# EAGLE board PCB (EAGLE 9.7.0)
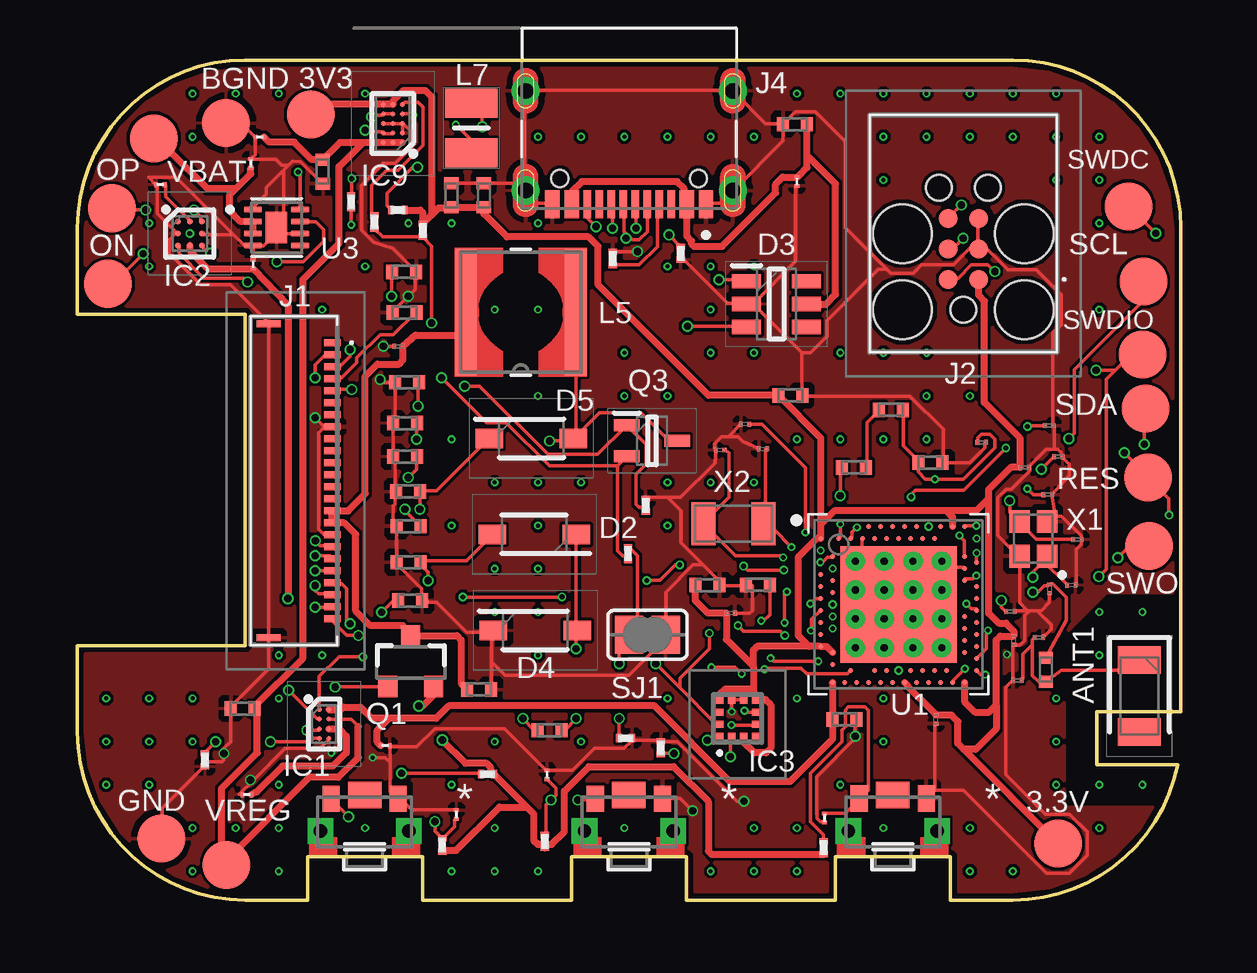
[diagram p0: board, top side]
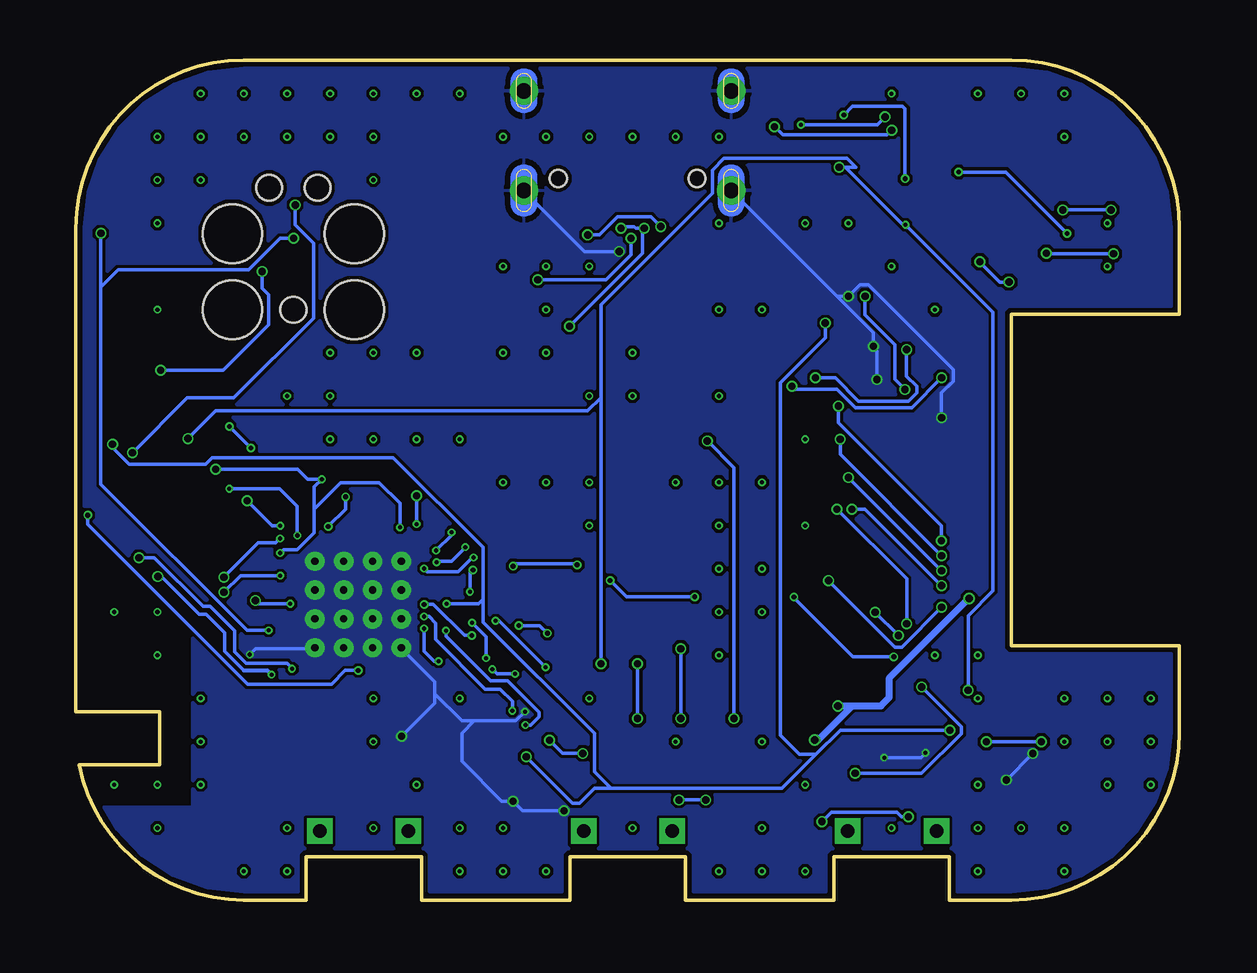
[diagram p1: board, bottom side, seen from below]

Size 46 x 35 mm. Coordinates in mm from the lower left corner, seen from the top.
Outline: 39,0 36.4,0 36.4,1.8 31.6,1.8 31.6,0 25.4,0 25.4,1.8 20.6,1.8 20.6,0 14.4,0 14.4,1.8 9.6,1.8 9.6,0 7,0 arc-90 0,7 0,10.6 7,10.6 7,24.4 0,24.4 0,28 arc-90 7,35 39,35 arc-90 46,28 46,7.85 42.5,7.85 42.5,5.63 45.86,5.63 arc-79 39,0
Copper layers (1*16): Top / Bottom
Stack-up Default Layer Stack: Top User Defined 0.035mm / Dielectric-1 User Defined 0.9mm / Bottom User Defined 0.035mm
Design rules: minimum copper width classes=1 0.3mm, minimum copper width classes=0 0.15mm, minimum copper width 5mil, minimum drill size 0.15mm, copper clearance wire_polygon to wire_polygon 5mil, copper clearance wire_polygon to pad_smd 5mil, copper clearance wire_polygon to via 5mil, copper clearance pad_smd to pad_smd 5mil, copper clearance pad_smd to via 5mil, copper clearance via to via 5mil, copper clearance smd to pad (same net) 5mil, copper clearance smd to via (same net) 5mil, copper clearance smd to smd (same net) 5mil, dimension clearance 0.2mm, via restrict clearance 0mil, restrict clearance 0mil, drill distance 6mil, keepout clearance 0mil
Net classes: 0 default: width 0.15 mm; 1 power: width 0.3 mm

## Footprints (pad centres in the part's own frame; a part is rotated, then mirrored left to right if it is on the bottom)
2450AT18B100E_ANTC3216X140N = smd 1.15 x 1.8: 1 -1.5,0; 2 1.5,0
NORDIC_NRF_3_RESC0201_L = smd 0.15 x 0.2: 1 -0.177,-0.004; 2 0.179,0
NORDIC_NRF_3_RESC0402_L = smd 0.5 x 0.6: 1 -0.5,0; 2 0.5,0
GRM011R60J152KE01L_1_0201 = smd 0.2 x 0.15: 1 0,0.185; 2 0,-0.185
ESP32_C6_LIBRARY_5_SOD3716X135N = smd 1.15 x 0.8: 1 -1.75,0; 2 1.75,0
ESP32_C6_LIBRARY_3_SOT95P280X145-6N = smd 1.2 x 0.6: 1 -1.25,0.95; 2 -1.25,0; 3 -1.25,-0.95; 4 1.25,-0.95; 5 1.25,0; 6 1.25,0.95
BQ25180YBGR_BGA8C40P2X4_100X155X50 = smd 0.2 x 0.2: A1 -0.2,0.6; A2 0.2,0.6; B1 -0.2,0.2; B2 0.2,0.2; C1 -0.2,-0.2; C2 0.2,-0.2; D1 -0.2,-0.6; D2 0.2,-0.6
DRV2605YZFR_BGA9C50P3X3_144X144X62 = smd 0.25 x 0.25: A1 -0.5,0.5; A2 0,0.5; A3 0.5,0.5; B1 -0.5,0; B2 0,0; B3 0.5,0; C1 -0.5,-0.5; C2 0,-0.5; C3 0.5,-0.5
BMA423_BMA423 = smd 0.3 x 0.35: 1 -0.75,-0.775; 2 -0.25,-0.775; 3 0.25,-0.775; 4 0.75,-0.775; 7 0.75,0.775; 8 0.25,0.775; 9 -0.25,0.775; 10 -0.75,0.775 | smd 0.35 x 0.3: 5 0.775,-0.25; 6 0.775,0.25; 11 -0.775,0.25; 12 -0.775,-0.25
RT6160AWSC_BGA15C40P3X5_140X230X60 = smd 0.216 x 0.216: A1 -0.4,0.8; A2 0,0.8; A3 0.4,0.8; B1 -0.4,0.4; B2 0,0.4; B3 0.4,0.4; C1 -0.4,0; C2 0,0; C3 0.4,0; D1 -0.4,-0.4; D2 0,-0.4; D3 0.4,-0.4; E1 -0.4,-0.8; E2 0,-0.8; E3 0.4,-0.8
503480-2400_5034802400 = smd 0.3 x 0.7: 1 -5.75,1.525; 2 -5.25,1.525; 3 -4.75,1.525; 4 -4.25,1.525; 5 -3.75,1.525; 6 -3.25,1.525; 7 -2.75,1.525; 8 -2.25,1.525; 9 -1.75,1.525; 10 -1.25,1.525; 11 -0.75,1.525; 12 -0.25,1.525; 13 0.25,1.525; 14 0.75,1.525; 15 1.25,1.525; 16 1.75,1.525; 17 2.25,1.525; 18 2.75,1.525; 19 3.25,1.525; 20 3.75,1.525; 21 4.25,1.525; 22 4.75,1.525; 23 5.25,1.525; 24 5.75,1.525 | smd 0.3 x 1: MP1 -6.54,-1.125; MP2 6.54,-1.125
TC2030-IDC_TC2030IDC = smd 0.783 x 0.783: 1 -0.953,-0.635; 2 -0.953,0.635; 3 0.317,-0.635; 4 0.317,0.635; 5 1.588,-0.635; 6 1.588,0.635 | hole 2.451: -2.223,-2.54; -2.223,2.54; 0.952,-2.54; 0.952,2.54 | hole 1.067: -2.223,0; 2.857,-1.016; 2.857,1.016
KH-TYPE-C-16P_KINGHELM_KH-TYPE-C-16P = smd 0.6 x 1.15: A1_B12 -3.2,4.725; A4_B9 -2.4,4.725; A9_B4 2.4,4.725; A12_B1 3.2,4.725 | smd 0.3 x 1.15: A5 -1.25,4.725; A6 -0.25,4.725; A7 0.25,4.725; A8 1.25,4.725; B5 1.75,4.725; B6 0.75,4.725; B7 -0.75,4.725; B8 -1.75,4.725 | drill 0.65 pad 1.05: SH1 -4.32,0; SH2 4.32,0; SH3 -4.32,4.15; SH4 4.32,4.15 | hole 0.7: -2.89,3.65; 2.89,3.65
NORDIC_NRF_2_RESC0402_L = smd 0.5 x 0.6: 1 -0.5,0; 2 0.5,0
ESP32_C6_LIBRARY_2_IND_4828-WE-TPC_WRE = smd 0.9 x 5.3: 1 -2.286,0; 2 2.286,0
MLP2016SR47MT0S1_INDC2016X100N = smd 1.2 x 2.2: 1 -1.028,0; 2 1.028,0
ESP32_C6_LIBRARY_4_ESP32_C6_LIBRARY_4_ESP32_C6_LIBRARY_4_ESP32_C6_LIBRARY_4_ESP32_WROVER_SPARKFUN-DISCRETESEMI_SOT23-3 = smd 0.8 x 0.9: 1 -0.95,-1; 2 0.95,-1; 3 0,1.1
ESP32_C6_LIBRARY_6_SOT65P210X110-3N = smd 1.05 x 0.5: 1 -1.05,0.65; 2 -1.05,-0.65; 3 1.05,0
ERA-1AEB3401C_0201 = smd 0.35 x 0.25: 1 0,0.275; 2 0,-0.275
ESP32_C6_LIBRARY_7_JUMPER_SJ = smd 1.168 x 1.6: 1 -0.762,0; 2 0.762,0
2025-10-22_07-23-44_LIBRARY_SW_EVP-AKE31A_PAN = smd 0.711 x 1.092: 1 -1.4,-0.972; 2 1.4,-0.972 | drill 0.559 pad 0.914 square: 3 -1.848,0.381; 4 1.848,0.381 | smd 1.397 x 1.092: 5 0,-1.124
HECTOR_WATCH_1_TP20R = smd 2 x 2: TP 0,0
NORDIC_NRF_4_AQFN50P700X700X85_HS-74N = smd 4.85 x 4.85: P$74 0,0 | drill 0.3 pad 0.6: P$75 -1.8,1.8; P$76 -0.6,1.8; P$77 0.6,1.8; P$78 1.8,1.8; P$79 -1.8,0.6; P$80 -0.6,0.6; P$81 0.6,0.6; P$82 1.8,0.6; P$83 -1.8,-0.6; P$84 -0.6,-0.6; P$85 0.6,-0.6; P$86 1.8,-0.6; P$87 -1.8,-1.8; P$88 -0.6,-1.8; P$89 0.6,-1.8; P$90 1.8,-1.8 | smd 0.2 x 0.2: P$A8 -1.25,3.25; P$A10 -0.75,3.25; P$A12 -0.25,3.25; P$A14 0.25,3.25; P$A16 0.75,3.25; P$A18 1.25,3.25; P$A20 1.75,3.25; P$A22 2.25,3.25; P$A23 2.75,3.25; P$AA24 3.25,-2.25; P$AB2 -2.75,-2.5; P$AC5 -2,-2.75; P$AC9 -1,-2.75; P$AC11 -0.5,-2.75; P$AC13 0,-2.75; P$AC15 0.5,-2.75; P$AC17 1,-2.75; P$AC19 1.5,-2.75; P$AC21 2,-2.75; P$AC24 3.25,-2.75; P$AD2 -2.75,-3.25; P$AD4 -2.25,-3.25; P$AD6 -1.75,-3.25; P$AD8 -1.25,-3.25; P$AD10 -0.75,-3.25; P$AD12 -0.25,-3.25; P$AD14 0.25,-3.25; P$AD16 0.75,-3.25; P$AD18 1.25,-3.25; P$AD20 1.75,-3.25; P$AD22 2.25,-3.25; P$AD23 2.75,-3.25; P$B1 -3.25,2.75; P$B3 -2.5,2.75; P$B5 -2,2.75; P$B7 -1.5,2.75; P$B9 -1,2.75; P$B11 -0.5,2.75; P$B13 0,2.75; P$B15 0.5,2.75; P$B17 1,2.75; P$B19 1.5,2.75; P$B24 3.25,2.75; P$C1 -3.25,2.25; P$D2 -2.75,2; P$D23 2.75,2; P$E24 3.25,1.75; P$F2 -2.75,1.5; P$F23 2.75,1.5; P$G1 -3.25,1.25; P$H2 -2.75,1; P$H23 2.75,1; P$J1 -3.25,0.75; P$J24 3.25,0.75; P$K2 -2.75,0.5; P$L1 -3.25,0.25; P$L24 3.25,0.25; P$M2 -2.75,0; P$N1 -3.25,-0.25; P$N24 3.25,-0.25; P$P2 -2.75,-0.5; P$P23 2.75,-0.5; P$R1 -3.25,-0.75; P$R24 3.25,-0.75; P$T2 -2.75,-1; P$T23 2.75,-1; P$U1 -3.25,-1.25; P$U24 3.25,-1.25; P$V23 2.75,-1.5; P$W1 -3.25,-1.75; P$W24 3.25,-1.75; P$Y2 -2.75,-2; P$Y23 2.75,-2
ESP32_C6_LIBRARY_SON50P200X200X80-9N = smd 0.76 x 0.27: 1 -0.985,0.75; 2 -0.985,0.25; 3 -0.985,-0.25; 4 -0.985,-0.75; 5 0.985,-0.75; 6 0.985,-0.25; 7 0.985,0.25; 8 0.985,0.75 | smd 0.9 x 1.3: 9 0,0
NORDIC_NRF_BT-XTAL_2016_N = smd 0.95 x 0.85: 1 -0.725,-0.575; 2 0.725,-0.575; 3 0.725,0.575; 4 -0.725,0.575
NORDIC_NRF_1_XTAL_3215_N = smd 1 x 1.8: 1 -1.25,0; 2 1.25,0

## Placement (x,y rotation side)
ANT1  2450AT18B100E  [2450AT18B100E_ANTC3216X140N]  44.27,8.5 270 top
C1  12pF  [NORDIC_NRF_3_RESC0201_L]  41.43,13.12 0 top
C1-EP-DR  10uF  [NORDIC_NRF_3_RESC0402_L]  16.74,8.77 180 top
C2  12pF  [NORDIC_NRF_3_RESC0201_L]  41.68,15.02 0 top
C2-EP-DR  4.7uF/25V  [NORDIC_NRF_3_RESC0402_L]  19.68,7.07 0 top
C3  1pF  [NORDIC_NRF_3_RESC0201_L]  40.52,12.97 270 top
C4  1pF  [NORDIC_NRF_3_RESC0201_L]  40.08,10.95 0 top
C5  100nF  [NORDIC_NRF_3_RESC0201_L]  27.83,19.82 180 top
C6  4.7uF  [NORDIC_NRF_3_RESC0402_L]  26.26,13.12 0 top
C7  100nF  [NORDIC_NRF_3_RESC0201_L]  35.78,7.52 270 top
C8  100nF  [NORDIC_NRF_3_RESC0201_L]  39.03,10.82 270 top
C9  820pF  [NORDIC_NRF_3_RESC0201_L]  38.88,12.02 0 top
C10  N.C.  [NORDIC_NRF_3_RESC0201_L]  40.88,18.47 0 top
C11  100pF  [NORDIC_NRF_3_RESC0201_L]  40.44,16.89 0 top
C12  100nF  [NORDIC_NRF_3_RESC0201_L]  39.48,18.02 0 top
C13  N.C.  [NORDIC_NRF_3_RESC0201_L]  40.5,19.77 0 top
C14  4.7uF  [NORDIC_NRF_3_RESC0402_L]  29.71,21.02 0 top
C15  1.0uF  [NORDIC_NRF_3_RESC0402_L]  35.56,18.22 0 top
C16  47nF  [NORDIC_NRF_3_RESC0201_L]  37.69,19.07 0 top
C17  12pF  [NORDIC_NRF_3_RESC0201_L]  28.58,18.8 0 top
C18  12pF  [NORDIC_NRF_3_RESC0201_L]  26.79,18.75 0 top
C19  100nF  [NORDIC_NRF_3_RESC0201_L]  27.23,11.95 0 top
C20  4.7uF  [NORDIC_NRF_3_RESC0402_L]  28.36,13.13 180 top
C21  4.7uF  [NORDIC_NRF_3_RESC0402_L]  31.96,7.52 0 top
C22  N.C.  [NORDIC_NRF_3_RESC0201_L]  39.18,9.15 180 top
C23  0.1uF  [GRM011R60J152KE01L_1_0201]  7.6,31.79 90 top
C24  10uF  [NORDIC_NRF_3_RESC0402_L]  10.23,30.34 90.2 top
C25  22uF  [NORDIC_NRF_3_RESC0402_L]  15.59,29.37 90 top
C27  0.1uF  [GRM011R60J152KE01L_1_0201]  7.23,30.68 0 top
C29  1uF  [GRM011R60J152KE01L_1_0201]  31.15,3.42 180 top
C30  1uF  [GRM011R60J152KE01L_1_0201]  15.8,3.57 0 top
C31  1uF  [GRM011R60J152KE01L_1_0201]  19.58,5.22 0 top
C32  1uF  [GRM011R60J152KE01L_1_0201]  3.46,29.8 90 top
C33  22uF  [NORDIC_NRF_3_RESC0402_L]  16.94,29.37 90 top
C34  0.1uF  [GRM011R60J152KE01L_1_0201]  7.33,26.49 0 top
C37  1uF  [GRM011R60J152KE01L_1_0201]  7.06,4.39 90 top
C38  1uF  [GRM011R60J152KE01L_1_0201]  12.83,6.43 270 top
C39  10uF  [NORDIC_NRF_3_RESC0402_L]  6.89,7.97 180 top
C42  0.1uF  [GRM011R60J152KE01L_1_0201]  29.99,29.93 0 top
C43  4.7uF  [NORDIC_NRF_3_RESC0402_L]  29.91,32.32 0 top
D2  MBR0530  [ESP32_C6_LIBRARY_5_SOD3716X135N]  19.04,15.23 180 top
D3  USBLC6-2SC6Y  [ESP32_C6_LIBRARY_3_SOT95P280X145-6N]  29.14,24.83 0 top
D4  MBR0530  [ESP32_C6_LIBRARY_5_SOD3716X135N]  19.08,11.23 0 top
D5  MBR0530  [ESP32_C6_LIBRARY_5_SOD3716X135N]  18.92,19.23 0 top
EPD_C1  1uF/50V  [NORDIC_NRF_3_RESC0402_L]  13.62,26.17 180 top
EPD_C2  1uF/50V  [NORDIC_NRF_3_RESC0402_L]  13.63,24.47 0 top
EPD_C5  0.1uF/50V  [NORDIC_NRF_3_RESC0201_L]  13.39,23.07 0 top
EPD_C6  1uF/50V  [NORDIC_NRF_3_RESC0402_L]  13.74,21.57 0 top
EPD_C7  1uF/50V  [NORDIC_NRF_3_RESC0402_L]  13.65,19.87 0 top
EPD_C8  1uF/50V  [NORDIC_NRF_3_RESC0402_L]  13.66,18.47 0 top
EPD_C9  1uF/50V  [NORDIC_NRF_3_RESC0402_L]  13.78,17.02 0 top
EPD_C10  1uF/50V  [NORDIC_NRF_3_RESC0402_L]  13.8,15.57 0 top
EPD_C11  1uF/50V  [NORDIC_NRF_3_RESC0402_L]  13.81,14.07 0 top
EPD_C12  1uF/50V  [NORDIC_NRF_3_RESC0402_L]  13.87,12.47 180 top
IC1  BQ25180YBGR  [BQ25180YBGR_BGA8C40P2X4_100X155X50]  10.28,7.33 0 top
IC2  DRV2605YZFR  [DRV2605YZFR_BGA9C50P3X3_144X144X62]  4.68,27.77 0 top
IC3  BMA421  [BMA423_BMA423]  27.52,7.57 0 top
IC9  RT6160AWSC  [RT6160AWSC_BGA15C40P3X5_140X230X60]  13.15,32.35 180 top
J1  503480-2400  [503480-2400_5034802400]  9.11,17.47 270 top
J2  TC2030-IDC  [TC2030-IDC_TC2030IDC]  36.93,26.81 90 top
J4  KH-TYPE-C-16P  [KH-TYPE-C-16P_KINGHELM_KH-TYPE-C-16P]  23,33.71 180 top
L1  3.9nH  [NORDIC_NRF_2_RESC0402_L]  40.37,9.58 270 top
L2  10μH  [NORDIC_NRF_2_RESC0402_L]  32.36,18.02 0 top
L3  15nH  [NORDIC_NRF_2_RESC0402_L]  33.91,20.42 0 top
L5  68uH  [ESP32_C6_LIBRARY_2_IND_4828-WE-TPC_WRE]  18.48,24.5 180 top
L7  FTC252012SR47MBCA  [MLP2016SR47MT0S1_INDC2016X100N]  16.42,32.16 270 top
Q1  20V/4.2A/52mΩ/1.4W  [ESP32_C6_LIBRARY_4_ESP32_C6_LIBRARY_4_ESP32_C6_LIBRARY_4_ESP32_C6_LIBRARY_4_ESP32_WROVER_SPARKFUN-DISCRETESEMI_SOT23-3]  13.9,9.9 0 top
Q3  SI1308EDL-T1-GE3  [ESP32_C6_LIBRARY_6_SOT65P210X110-3N]  23.95,19.13 0 top
R1_EP_DR  0.47  [ERA-1AEB3401C_0201]  22.95,14.43 0 top
R1_USB  5K1  [ERA-1AEB3401C_0201]  22.31,26.73 0 top
R2  0  [ERA-1AEB3401C_0201]  12.38,28.25 180 top
R2_EP_DR  10K  [ERA-1AEB3401C_0201]  23.69,16.44 0 top
R2_USB  5K1  [ERA-1AEB3401C_0201]  25.15,26.94 0 top
R3  0  [ERA-1AEB3401C_0201]  24.31,6.34 0 top
R4  0  [ERA-1AEB3401C_0201]  11.41,29.09 180 top
R5  10K  [ERA-1AEB3401C_0201]  15.21,2.29 0 top
R7  10K  [ERA-1AEB3401C_0201]  31.11,2.18 0 top
R8  10K  [ERA-1AEB3401C_0201]  19.48,2.44 0 top
R9  10K  [ERA-1AEB3401C_0201]  5.31,5.84 180 top
R17  3K3  [ERA-1AEB3401C_0201]  13.36,28.75 270 top
R18  3K3  [ERA-1AEB3401C_0201]  14.4,27.9 0 top
R_PWR_EPD  10K  [ERA-1AEB3401C_0201]  17.09,5.24 90 top
R_TYPE_SEL  2.2  [ERA-1AEB3401C_0201]  22.85,6.74 270 top
SJ1  [ESP32_C6_LIBRARY_7_JUMPER_SJ]  23.76,11.05 180 top
SW_DN  2025-10-22_07-23-44_LIBRARY_EVP-AKE31ASW_EVP-AKE31A_PAN  [2025-10-22_07-23-44_LIBRARY_SW_EVP-AKE31A_PAN]  33.99,3.26 180 top
SW_ENT  2025-10-22_07-23-44_LIBRARY_EVP-AKE31ASW_EVP-AKE31A_PAN  [2025-10-22_07-23-44_LIBRARY_SW_EVP-AKE31A_PAN]  22.99,3.25 180 top
SW_UP  2025-10-22_07-23-44_LIBRARY_EVP-AKE31ASW_EVP-AKE31A_PAN  [2025-10-22_07-23-44_LIBRARY_SW_EVP-AKE31A_PAN]  11.98,3.25 180 top
TP_3.3V  HECTOR_WATCH_1_TPTP20R  [HECTOR_WATCH_1_TP20R]  40.88,2.35 0 top
TP_3V3  HECTOR_WATCH_1_TPTP20R  [HECTOR_WATCH_1_TP20R]  9.74,32.73 0 top
TP_BAT_GND  HECTOR_WATCH_1_TPTP20R  [HECTOR_WATCH_1_TP20R]  6.2,32.37 0 top
TP_GND  HECTOR_WATCH_1_TPTP20R  [HECTOR_WATCH_1_TP20R]  3.5,2.56 0 top
TP_ON  HECTOR_WATCH_1_TPTP20R  [HECTOR_WATCH_1_TP20R]  1.28,25.68 0 top
TP_OP  HECTOR_WATCH_1_TPTP20R  [HECTOR_WATCH_1_TP20R]  1.44,28.82 0 top
TP_RESET  HECTOR_WATCH_1_TPTP20R  [HECTOR_WATCH_1_TP20R]  44.62,17.6 0 top
TP_SCL  HECTOR_WATCH_1_TPTP20R  [HECTOR_WATCH_1_TP20R]  44.44,25.77 0 top
TP_SDA  HECTOR_WATCH_1_TPTP20R  [HECTOR_WATCH_1_TP20R]  44.52,20.48 0 top
TP_SWDCLK  HECTOR_WATCH_1_TPTP20R  [HECTOR_WATCH_1_TP20R]  43.81,28.9 0 top
TP_SWDIO  HECTOR_WATCH_1_TPTP20R  [HECTOR_WATCH_1_TP20R]  44.41,22.74 0 top
TP_SWO  HECTOR_WATCH_1_TPTP20R  [HECTOR_WATCH_1_TP20R]  44.66,14.75 0 top
TP_VBAT  HECTOR_WATCH_1_TPTP20R  [HECTOR_WATCH_1_TP20R]  3.19,31.73 0 top
TP_VREG  HECTOR_WATCH_1_TPTP20R  [HECTOR_WATCH_1_TP20R]  6.22,1.47 0 top
U1  NRF52840_QF  [NORDIC_NRF_4_AQFN50P700X700X85_HS-74N]  34.23,12.31 0 top
U3  MAX17048G+T10  [ESP32_C6_LIBRARY_SON50P200X200X80-9N]  8.3,28.02 0 top
X1  32MHz  [NORDIC_NRF_BT-XTAL_2016_N]  39.85,15.05 90 top
X2  32.768kHz  [NORDIC_NRF_1_XTAL_3215_N]  27.34,15.67 180 top

## Library data of the parts
ANT1 = InkTime_v5; ARROW_PART_NUMBER: 2450AT18B100E; ARROW_PRICE-STOCK: https://www.arrow.com/en/products/2450at18b100e/johanson-dielectrics?utm_currency=USD&region=nac; DESCRIPTION: Antennas 2.45GHz ANTENNA; HEIGHT: 1.4mm; MANUFACTURER_NAME: JOHANSON TECHNOLOGY; MANUFACTURER_PART_NUMBER: 2450AT18B100E; MOUSER_PART_NUMBER: 609-2450AT18B100E; MOUSER_PRICE-STOCK: https://www.mouser.co.uk/ProductDetail/Johanson-Technology/2450AT18B100E?qs=yCnrNFeXz%252Bh5MFsFIXGZGA%3D%3D
C1 C1-EP-DR C2 C2-EP-DR C3-C25 C27 C29-C34 C37-C39 C42 C43 EPD_C1 EPD_C2 EPD_C5-EPD_C12 L1-L3 R1_EP_DR R1_USB R2 R2_EP_DR R2_USB R3-R5 R7-R9 R17 R18 R_PWR_EPD R_TYPE_SEL SJ1 TP_3.3V TP_3V3 TP_BAT_GND TP_GND TP_ON TP_OP TP_RESET TP_SCL TP_SDA TP_SWDCLK TP_SWDIO TP_SWO TP_VBAT TP_VREG U1 X1 X2 = InkTime_v5
D2 D4 D5 = InkTime_v5; AVAILABILITY: In Stock; CHECK_PRICES: https://www.snapeda.com/parts/MBR0530/Onsemi/view-part/?ref=eda; DESCRIPTION: Diode Schottky 30 V 500mA Surface Mount SOD-123; MF: ON Semiconductor; MP: MBR0530; PACKAGE: SOD-123-2 ON Semiconductor; PRICE: None; PURCHASE-URL: https://www.snapeda.com/api/url_track_click_mouser/?unipart_id=179458&manufacturer=ON Semiconductor&part_name=MBR0530&search_term=None; SNAPEDA_LINK: https://www.snapeda.com/parts/MBR0530/Onsemi/view-part/?ref=snap
D3 = InkTime_v5; AVAILABILITY: In Stock; CHECK_PRICES: https://www.snapeda.com/parts/USBLC6-2SC6Y/STMicroelectronics/view-part/?ref=eda; DESCRIPTION: 17V Clamp 5A (8/20µs) Ipp Tvs Diode Surface Mount SOT-23-6; MF: STMicroelectronics; MP: USBLC6-2SC6Y; PACKAGE: SOT-23-6 STMicroelectronics; PRICE: None; SNAPEDA_LINK: https://www.snapeda.com/parts/USBLC6-2SC6Y/STMicroelectronics/view-part/?ref=snap
IC1 = InkTime_v5; ARROW_PART_NUMBER: BQ25180YBGR; ARROW_PRICE-STOCK: https://www.arrow.com/en/products/bq25180ybgr/texas-instruments?utm_currency=USD&region=nac; DESCRIPTION: Charger IC Lithium Ion/Polymer, Lithium Iron Phosphate 8-DSBGA (1.6x1.1); HEIGHT: 0.5mm; MANUFACTURER_NAME: Texas Instruments; MANUFACTURER_PART_NUMBER: BQ25180YBGR; MOUSER_PART_NUMBER: 595-BQ25180YBGR; MOUSER_PRICE-STOCK: https://www.mouser.co.uk/ProductDetail/Texas-Instruments/BQ25180YBGR?qs=doiCPypUmgEWjAK%252BJAX6Tw%3D%3D
IC2 = InkTime_v5; ARROW_PART_NUMBER: DRV2605YZFR; ARROW_PRICE-STOCK: https://www.arrow.com/en/products/drv2605yzfr/texas-instruments?region=nac; DESCRIPTION: Haptic Driver for ERM/LRA with Built-In Library and Smart Loop Architecture; HEIGHT: 0.625mm; MANUFACTURER_NAME: Texas Instruments; MANUFACTURER_PART_NUMBER: DRV2605YZFR
IC3 = InkTime_v5; ARROW_PART_NUMBER: BMA423; ARROW_PRICE-STOCK: https://www.arrow.com/en/products/bma423/bosch; DESCRIPTION: Accelerometers Triaxial low-g 12bit Acceleration Sensor; HEIGHT: 1mm; MANUFACTURER_NAME: BOSCH; MANUFACTURER_PART_NUMBER: BMA423; MOUSER_PART_NUMBER: 262-BMA423; MOUSER_PRICE-STOCK: https://www.mouser.co.uk/ProductDetail/Bosch-Sensortec/BMA423?qs=HXFqYaX1Q2xC%252BSgeGoX3mg%3D%3D
IC9 = InkTime_v5; DESCRIPTION: Buck-Boost Regulator Positive Output Step-Up/Step-Down I2C DC-DC Controller IC 15-WL-CSP (BSC) (1.4x2.3); HEIGHT: 0.6mm; MANUFACTURER_NAME: RICHTEK; MANUFACTURER_PART_NUMBER: RT6160AWSC; MOUSER_PART_NUMBER: 835-RT6160AWSC; MOUSER_PRICE-STOCK: https://www.mouser.co.uk/ProductDetail/Richtek/RT6160AWSC?qs=amGC7iS6iy%2FLd9PSoixZXQ%3D%3D
J1 = InkTime_v5; DESCRIPTION: FFC & FPC Connectors 0.5mm FPC RA SMT Dual Contact 24Ckt; HEIGHT: 1.87mm; MANUFACTURER_NAME: Molex; MANUFACTURER_PART_NUMBER: 503480-2400; MOUSER_PART_NUMBER: 538-503480-2400; MOUSER_PRICE-STOCK: https://www.mouser.co.uk/ProductDetail/Molex/503480-2400?qs=OAhjpuo3Vu7efIoxFh9AOw%3D%3D
J2 = InkTime_v5; DESCRIPTION: CABLE ADAPTER 6 POS; HEIGHT: 19mm; MANUFACTURER_NAME: Tag Connect; MANUFACTURER_PART_NUMBER: TC2030-IDC
J4 = InkTime_v5; AVAILABILITY: Not in stock; CHECK_PRICES: https://www.snapeda.com/parts/KH-TYPE-C-16P/Kinghelm/view-part/?ref=eda; MF: kinghelm; MP: KH-TYPE-C-16P; PACKAGE: None; PRICE: None; SNAPEDA_LINK: https://www.snapeda.com/parts/KH-TYPE-C-16P/Kinghelm/view-part/?ref=snap
L5 = InkTime_v5; COPYRIGHT: Copyright (C) 2024 Ultra Librarian. All rights reserved.; MANUFACTURER_PART_NUMBER: 744043680; MFR_NAME: Wurth Electronics
L7 = InkTime_v5; DESCRIPTION: SMD / SMT Inductors (Coils), L=0.47?H, L x W x T :; HEIGHT: 1mm; JLCPCB: https://jlcpcb.com/partdetail/6763488-FTC252012SR47MBCA/C5832368; MANUFACTURER_NAME: TDK; MANUFACTURER_PART_NUMBER: FTC252012SR47MBCA
Q1 = InkTime_v5; PROD_ID: TRAN-14388
Q3 = InkTime_v5; AVAILABILITY: In Stock; CHECK_PRICES: https://www.snapeda.com/parts/SI1308EDL-T1-GE3/Vishay+Siliconix/view-part/?ref=eda; DESCRIPTION: Si1308EDL-T1-GE3 N-channel MOSFET Transistor, 1.5 A, 30 V, 3-Pin SC-70 | Siliconix / Vishay SI1308EDL-T1-GE3; MF: Vishay Siliconix; MP: SI1308EDL-T1-GE3; PACKAGE: SOT-323 Vishay Semiconductor; PRICE: None; PURCHASE-URL: https://www.snapeda.com/api/url_track_click_mouser/?unipart_id=274603&manufacturer=Vishay Siliconix&part_name=SI1308EDL-T1-GE3&search_term=None; SNAPEDA_LINK: https://www.snapeda.com/parts/SI1308EDL-T1-GE3/Vishay+Siliconix/view-part/?ref=snap
SW_DN SW_ENT SW_UP = InkTime_v5; COPYRIGHT: Copyright (C) 2025 Ultra Librarian. All rights reserved.; DIGI-KEY_PART_NUMBER_1: P123437TR-ND; DIGI-KEY_PART_NUMBER_2: P123437CT-ND; DIGI-KEY_PART_NUMBER_3: P123437DKR-ND; MANUFACTURER_NAME: Panasonic; MANUFACTURER_PART_NUMBER: EVP-AKE31A
U3 = InkTime_v5; AVAILABILITY: In Stock; CHECK_PRICES: https://www.snapeda.com/parts/MAX17048G+T10/Analog+Devices/view-part/?ref=eda; DESCRIPTION: 3µA 1-Cell/2-Cell Fuel Gauge with ModelGauge; MF: Analog Devices; MP: MAX17048G+T10; PACKAGE: TDFN-8 Maxim; PRICE: None; PURCHASE-URL: https://www.snapeda.com/api/url_track_click_mouser/?unipart_id=329239&manufacturer=Analog Devices&part_name=MAX17048G+T10&search_term=None; SNAPEDA_LINK: https://www.snapeda.com/parts/MAX17048G+T10/Analog+Devices/view-part/?ref=snap

## Nets
3V3/1.7D [power]: C34.2 IC2.C2 Q1.2 R5.2 R7.2 R8.2 R_PWR_EPD.2
3V3/2.4A [power]: C6.1 C7.1 C8.1 C12.1 C14.1 C19.1 C25.1 C33.1 IC3.3 IC3.7 IC3.10 IC9.E2 IC9.E3 J2.1 R17.1 R18.1 TP_3.3V.TP TP_3V3.TP U1.P$A22 U1.P$AD14 U1.P$AD23 U1.P$B1 U1.P$W1 U1.P$Y2
ALERT/1.6C: U3.5
ALERT/2.5C: U1.P$J24
D+/1.5D: D3.4
D+/2.7D: U1.P$AD6
D-/1.5D: D3.6
D-/2.7D: U1.P$AD4
DEC1: C5.1 U1.P$C1
DEC3: C11.1 U1.P$D23
DEC4_6: C10.1 C15.1 C16.1 L3.2 U1.P$B5 U1.P$E24
DN: D3.1 J4.A7 J4.B7
DP: D3.3 J4.A6 J4.B6
EPD_3V3 [power]: C1-EP-DR.2 EPD_C5.2 J1.15 J1.16 L5.2 Q1.3
EPD_BUSY/1.5D: J1.9
EPD_BUSY/2.2D: U1.P$AD12
EPD_CS/1.4C: J1.12
EPD_CS/2.2D: U1.P$K2
EPD_DC/1.5D: J1.11
EPD_DC/2.2D: U1.P$AD10
EPD_RST/1.5D: J1.10
EPD_RST/2.2D: U1.P$AC11
GDR: J1.2 Q3.1 R2_EP_DR.2
GND: C1-EP-DR.1 C1.2 C2.2 C3.2 C4.2 C5.2 C6.2 C7.2 C8.2 C9.2 C10.2 C11.2 C12.2 C13.2 C14.2 C15.2 C16.2 C17.1 C18.1 C19.2 C20.2 C21.2 C22.2 C23.1 C24.1 C25.2 C27.1 C29.1 C30.1 C31.1 C32.1 C33.2 C34.1 C37.1 C38.1 C39.2 C42.2 C43.1 D3.2 D4.1 EPD_C1.1 EPD_C2.1 EPD_C5.1 EPD_C6.1 EPD_C7.1 EPD_C8.1 EPD_C9.1 EPD_C10.1 EPD_C11.1 EPD_C12.1 IC1.D2 IC2.B1 IC2.B3 IC3.8 IC3.9 IC9.B1 IC9.C1 IC9.C2 IC9.C3 J1.8 J1.17 J1.MP1 J1.MP2 J2.3 J2.5 J4.A1_B12 J4.A12_B1 J4.SH1 J4.SH2 J4.SH3 J4.SH4 R1_USB.1 R2_EP_DR.1 R2_USB.2 R3.1 R9.1 R_TYPE_SEL.1 SJ1.1 SW_DN.1 SW_ENT.1 SW_UP.1 TP_BAT_GND.TP TP_GND.TP U1.P$74 U1.P$75 U1.P$76 U1.P$77 U1.P$78 U1.P$79 U1.P$80 U1.P$81 U1.P$82 U1.P$83 U1.P$84 U1.P$85 U1.P$86 U1.P$87 U1.P$88 U1.P$89 U1.P$90 U1.P$B7 U1.P$F23 U3.1 U3.4 U3.6 U3.9 X1.2 X1.4
HAPTIC_EN/1.4C: IC2.A1
HAPTIC_EN/2.6A: U1.P$U1
IMU_INT1: IC3.5 U1.P$N1
IMU_INT2: IC3.6 U1.P$P2
LX1: IC9.B2 IC9.B3 L7.1
LX2: IC9.D2 IC9.D3 L7.2
MOSI/1.5B: J1.14
MOSI/2.2D: U1.P$B13
N$1: C20.1 U1.P$AC5
N$2: L2.2 L3.1
N$3: L2.1 U1.P$B3
N$4: C1.1 U1.P$B24 X1.1
N$5: EPD_C12.2 J1.24
N$6: C2.1 U1.P$A23 X1.3
N$7: IC9.E1 R2.2
N$8: IC9.D1 R4.2
N$9: IC1.D1 R9.2
N$10: C13.1 U1.P$A18
N$11: C9.1 U1.P$N24
N$12: IC3.1 R3.2
N$13: C32.2 IC2.A2
N$14: C3.1 L1.1 U1.P$H23
N$15: R1_EP_DR.1 R_TYPE_SEL.2 SJ1.2
N$16: EPD_C10.2 J1.22
N$17: EPD_C8.2 J1.20
N$18: EPD_C7.2 J1.19
N$19: EPD_C6.2 J1.18
N$20: C2-EP-DR.1 D5.2 L5.1 Q3.3
N$21: C2-EP-DR.2 D2.1 D4.2
N$22: J4.B5 R2_USB.1
N$26: EPD_C2.2 J1.4
N$27: EPD_C1.2 J1.5
N$29: J4.A5 R1_USB.2
OUT+: IC2.A3 TP_OP.TP
OUT-: IC2.C3 TP_ON.TP
P0.00/XL1: C17.2 U1.P$D2 X2.1
P0.01/XL2: C18.2 U1.P$F2 X2.2
P0.04: U1.P$J1
P0.09: U1.P$L24
P0.13/1.5D: C30.2 R5.1 SW_UP.2
P0.13/2.6C: U1.P$AD8
P0.14/1.5D: C31.2 R8.1 SW_ENT.2
P0.14/2.7C: U1.P$AC9
P0.19: U1.P$AC15
P0.20: U1.P$AD16
P0.21: U1.P$AC17
P0.22: U1.P$AD18
P0.23: U1.P$AC19
P0.24: U1.P$AD20
P0.25: U1.P$AC21
P0.26: U1.P$G1
P0.27: U1.P$H2
P0.28: U1.P$B11
P0.29: U1.P$A10
P0.30: U1.P$B9
P0.31: U1.P$A8
P1.01/1.6C: Q1.1 R_PWR_EPD.1
P1.01/2.4B: U1.P$Y23
P1.02/1.6C: C29.2 R7.1 SW_DN.2
P1.02/2.8C: U1.P$W24
P1.03: U1.P$V23
P1.04: U1.P$U24
P1.05: U1.P$T23
P1.06: U1.P$R24
P1.07: U1.P$P23
P1.09: U1.P$R1
P1.10: U1.P$A20
P1.11: U1.P$B19
P1.12: U1.P$B17
P1.13: U1.P$A16
P1.14: U1.P$B15
P1.15: U1.P$A14
PMIC_INT: IC1.A1 U1.P$T2
PREVGH: D5.1 EPD_C9.2 J1.21
PREVGL: D2.2 EPD_C11.2 J1.23
RESE: J1.3 Q3.2 R1_EP_DR.2
RESET: J2.6 TP_RESET.TP U1.P$AC13
RF: ANT1.1 C4.1 C22.1 L1.2
SCK/1.5B: J1.13
SCK/2.2D: U1.P$A12
SCL/1.4C: IC2.C1 U3.7
SCL/2.4C: IC1.B1 IC3.12 R4.1 R17.2 TP_SCL.TP U1.P$M2
SDA/1.4C: IC2.B2 U3.8
SDA/2.4C: IC1.C1 IC3.2 R2.1 R18.2 TP_SDA.TP U1.P$L1
SWDCLK: J2.4 TP_SWDCLK.TP U1.P$AA24
SWDIO: J2.2 TP_SWDIO.TP U1.P$AC24
SWO: TP_SWO.TP U1.P$AD22
VBAT/1.2A [power]: C27.2 TP_VBAT.TP U3.2 U3.3
VBAT/2.5C [power]: C37.2 IC1.C2
VBUS/1.5D [power]: C42.1 C43.2 D3.5 J4.A4_B9 J4.A9_B4
VBUS/2.6D [power]: C21.1 C38.2 IC1.A2 U1.P$AD2
VREG [power]: C23.2 C24.2 C39.1 IC1.B2 IC9.A1 IC9.A2 IC9.A3 TP_VREG.TP

## Tracks (layer width: path | path; a pad name or v marks a point on that pad's centre or on a via)
3V3/1.7D  (via drill 0.32, 0.32 pad 0.14)
  Top 0.3: v14.24,8.08 14.4,8.08 14.85,8.53 Q1.2 | 18.74,3.87 R_PWR_EPD.2 17.22,5.39 17.22,5.53 17.06,5.69 16.18,5.69 v15.21,6.66 | R5.2 15.25,2.07 15.8,2.07 17.6,3.87 18.74,3.87 | 18.74,3.87 19.03,3.59 19.03,2.48 19.19,2.32 19.33,2.32 R8.2 19.63,2.32 19.77,2.32 20.3,2.85 20.3,4.53 21.32,5.55 24.86,5.55 26.3,4.11 26.3,2.03 26.43,1.9 R7.2 | IC2.C2 4.68,27.05 5.43,26.31 C34.2 8.78,24.77 v8.78,12.57 v8.77,12.56
  Bottom 0.3: 13.65,8.09 13.7,8.03 15.08,6.66 v15.21,6.66 | 13.65,8.09 13.64,8.09 12.44,8.09 12.1,8.43 12.1,9.23 v8.77,12.56 | v14.24,8.08 v14.23,8.09 13.65,8.09
3V3/2.4A
  Top 0.3: U1.P$AD14 34.61,8.94 34.61,8.91 35.74,7.78 C7.1 36.44,7.7 36.7,7.43 36.7,6.53 36.95,6.28 | C6.1 25.76,12.47 26.29,11.95 C19.1 27.06,10.86 28.18,9.73 | TP_3.3V.TP 36.95,6.28 | J2.1 37.57,25.2 37.82,24.96 37.82,24.22 37.8,24.21 37.8,20.73 39.31,19.23 C12.1 38.91,18.02 37.99,17.11 37.99,16.73 | R17.1 14.29,28.75 14.4,28.64 R18.1 | R18.1 15.05,28.83 15.55,28.83 C25.1 C33.1 16.94,28.59 17.9,27.63 21.3,27.63 21.7,27.23 21.7,25.63 26.31,21.02 C14.1 30.98,19.25 30.98,15.63 | U1.P$Y2 31.23,10.56 U1.P$W1 30.5,10.56 | 30.5,10.56 28.33,10.56 28.18,10.41 28.18,9.73 | R18.1 14.77,28.55 14.77,33.47 14.5,33.73 13.59,33.73 13.17,33.31 13.17,33.17 IC9.E2 IC9.E3 10.16,33.15 TP_3V3.TP | 38.3,8.13 38.3,10.83 38.47,11 C8.1 39.03,11.21 38.7,11.53 38.4,11.53 37.99,11.94 37.99,16.73 | 28.18,8.66 28.04,8.8 27.01,8.8 26.77,8.56 IC3.10 | 28.18,9.73 28.18,8.66 | IC3.3 27.77,6.58 28.22,6.13 28.7,6.13 28.9,6.33 28.9,8.13 28.69,8.35 IC3.7 28.27,8.56 28.18,8.66 | 30.98,15.63 U1.P$B1 30.84,15.07 30.04,14.27 30.04,11.02 30.5,10.56 | 38.3,8.13 38,7.83 37.41,7.83 36.98,8.26 U1.P$AD23 | 38.3,8.13 38.3,7.13 37.45,6.28 36.95,6.28 | 30.98,15.63 31.58,16.23 36.2,16.23 | 36.2,16.23 36.48,15.95 U1.P$A22 | 36.2,16.23 37.49,16.23 37.99,16.73
DEC1  (via drill 0.17)
  Top 0.15: C5.1 28.53,19.83 30.34,18.01 v30.34,15.32
  Bottom 0.15: U1.P$C1 30.34,15.2 v30.34,15.32
  other vias: 30.98,14.56
DEC3  (via drill 0.17)
  Top 0.15: C11.1 39.85,16.89 v39.6,17.13 | v36.77,15.19 36.98,14.97 U1.P$D23
  Bottom 0.15: v39.6,17.13 37.5,17.13 36.77,16.4 v36.77,15.19
DEC4_6  (via drill 0.17, 0.3)
  Top 0.15: v37.48,14.46 U1.P$E24 | U1.P$E24 | v32.49,15.52 32.28,15.32 32.28,15.11 U1.P$B5 | C16.1 37.55,19.13 37.55,19.26 37.69,19.4 38.03,19.4 38.24,19.19 38.24,18.85 36.92,17.53 v35.75,17.53 35.34,17.53 35.06,17.85 C15.1 35.05,18.29 34.43,18.92 34.43,20.37 L3.2 | v40.18,17.95 40.66,18.43 C10.1
  Bottom 0.15: v37.48,14.46 37.34,14.6 36.77,14.6 36.07,15.3 36.07,16.28 | 36.07,16.28 36.07,17.21 v35.75,17.53 36.34,17.53 36.76,17.95 v40.18,17.95 | 36.07,16.28 34.96,17.39 33.36,17.39 32.49,16.52 v32.49,15.52
DN  (via drill 0.3)
  Top 0.15: 22.87,27.78 22.8,27.85 22.8,28.96 J4.A7 | J4.B7 23.77,28.96 23.77,27.85 23.42,27.5 23.2,27.5 23.14,27.5 22.87,27.78 | v26.74,25.84 27.85,25.84 D3.1 | 22.87,27.78 v22.87,27.57
  Bottom 0.15: v26.74,25.84 23.9,25.84 22.87,26.88 v22.87,27.57
DP  (via drill 0.3)
  Top 0.15: v22.31,27.99 22.31,28.96 J4.B6 | v23.28,27.99 23.28,28.96 J4.A6 | v25.43,23.9 27.85,23.9 D3.3
  Bottom 0.15: v23.28,27.99 23.21,28.06 22.73,28.06 22.66,27.99 v22.31,27.99 22.38,27.92 22.38,26.95 v25.43,23.9
EPD_3V3
  Top 0.3: Q1.3 13.88,11.01 13.98,11.01 | 13.98,11.01 13.56,11.43 12.2,11.43 11.6,12.03 11.6,15.23 11.12,15.72 J1.16 J1.15 11.29,16.22 12,16.93 12,21.83 12.5,22.33 13.4,22.33 13.57,22.5 EPD_C5.2 14.11,23.53 16,23.53 16.15,23.56 16.15,24.45 L5.2 | C1-EP-DR.2 16,9.01 16,10.83 15.83,11.01 13.98,11.01
GDR  (via drill 0.3)
  Top 0.15: R2_EP_DR.2 23.63,16.22 23.49,16.36 23.42,16.36 23.28,16.49 23.28,17.74 23.7,18.16 23.7,18.99 22.94,19.75 Q3.1 22.87,19.75 21.69,18.57 19.61,18.57 16.77,21.41 v16.15,21.41 | v9.92,21.76 9.92,22.31 10.26,22.66 10.61,22.66 J1.2
  Bottom 0.15: v9.92,21.76 11.16,20.51 13.52,20.51 14.28,21.27 16.01,21.27 v16.15,21.41
GND  (via drill 0.17, 0.3)
  Top 0.15: 6.52,27.71 5.21,27.71 IC2.B3 | 8.61,30.42 8.23,30.04 7.87,29.69 7.87,29.41 7.32,28.86 U3.1 | 8.61,30.42 8.81,30.62 | 8.81,30.62 8.97,30.79 9.31,30.76 C24.1 | 8.4,28.04 8.6,28.08 8.6,30.41 8.61,30.42 | 8.4,28.04 U3.9 8.28,28.02 8.17,27.67 7.77,27.27 U3.4 | 7.32,4.96 8.67,6.31 10.12,6.31 | 7.32,4.96 6.76,4.4 C37.1 | TP_GND.TP 3.55,2.57 3.55,3.82 5.28,5.55 R9.1 5.35,5.62 5.48,5.76 6.03,5.76 6.11,5.83 v6.11,6.11 6.11,6.31 6.38,6.59 6.38,7.91 C39.2 6.38,8.05 7.98,9.64 7.98,10.88 J1.MP2 7.98,10.95 7.98,23.97 J1.MP1 7.98,24.04 6.38,25.63 5.14,25.63 3.82,26.95 3.82,27.5 4.1,27.78 IC2.B1 4.17,27.78 3.34,28.61 3.34,29.77 C32.1 2.97,30.11 4.13,30.11 6,28.23 6.52,27.71 | v7.22,5 7.28,5 7.32,4.96 | 13.03,5.73 13.03,4.51 13.31,4.24 SW_UP.1 13.45,4.24 13.93,3.75 15.73,3.75 C30.1 | 13.03,5.73 13.03,6.38 | 13.03,6.38 C38.1 | 13.03,6.38 14.14,6.38 14.9,7.15 17.81,7.15 19.54,5.41 C31.1 19.61,5.41 20.65,5.41 21.55,6.31 22.8,6.31 23.07,6.59 23.07,6.73 R_TYPE_SEL.1 23.14,6.66 24.25,6.66 R3.1 24.32,6.59 25.01,6.59 27.49,4.11 v27.78,4.11 | 32.49,14.14 32.7,14.35 32.7,15.04 U1.P$B7 | U1.P$F23 36.92,13.86 36.3,13.86 36.09,14.07 U1.P$74 | U1.P$83 32.49,11.72 33.6,11.72 U1.P$74 | U1.P$79 32.49,12.96 33.05,13.52 U1.P$74 | 32.49,14.14 U1.P$75 | 32.49,14.14 U1.P$74 | U1.P$88 33.67,10.54 33.67,11.65 U1.P$74 | U1.P$89 34.78,10.54 33.74,10.54 U1.P$88 | U1.P$84 33.67,11.72 U1.P$74 | U1.P$85 34.78,11.72 34.22,12.27 U1.P$74 | U1.P$90 36.02,10.54 36.02,11.65 U1.P$74 | U1.P$86 U1.P$74 | U1.P$80 33.67,12.96 U1.P$74 | U1.P$81 34.85,12.96 U1.P$74 | U1.P$76 33.6,14.07 33.12,13.59 U1.P$74 | U1.P$77 34.85,14.07 35.4,13.52 U1.P$74
  Top 0.15: U1.P$82 36.02,12.96 35.54,13.45 U1.P$74 | U1.P$78 36.09,14.14 U1.P$74 | v32.42,6.82 32.42,7.49 C21.2 | v32.42,6.82 32.42,6.73 30.83,5.14 30.83,3.41 30.97,3.27 31.11,3.27 C29.1 | v25.65,3.71 25.13,4.24 24.46,4.24 SW_ENT.1 | v32.43,6.82 v32.42,6.82 | U1.P$88 33.6,10.54 32.49,10.54 U1.P$87 | 27.83,13.1 26.81,13.1 C6.2 26.74,13.17 26.74,13.31 26.09,13.97 | 27.83,13.1 28.13,13.1 28.13,12.06 28.02,11.95 C19.2 | 27.13,19.31 C5.2 | C17.1 27.72,19.12 27.54,19.31 27.13,19.31 | 24.6,16.77 25.15,16.77 26.58,18.2 C18.1 26.55,18.81 26.55,19.02 26.84,19.31 27.13,19.31 | 24.6,16.77 23.7,16.77 R2_EP_DR.1 | 26.09,13.97 25.16,14.89 25.16,16.21 24.6,16.77 | 17.26,9.93 17.26,11.16 D4.1 17.19,11.16 16.22,11.16 14.97,12.41 14.42,12.41 EPD_C12.1 14.35,12.48 14.35,12.96 13.31,14 EPD_C11.1 13.31,14.14 13.31,15.52 EPD_C10.1 13.24,15.59 13.17,15.66 13.17,16.42 13.24,16.49 13.24,16.98 EPD_C9.1 13.24,17.05 13.24,18.5 EPD_C8.1 13.17,18.5 13.17,19.82 EPD_C7.1 13.24,19.82 13.24,21.55 EPD_C6.1 13.17,21.55 12.76,21.55 v12.62,21.69 | 17.26,9.93 17.26,8.81 C1-EP-DR.1 | 40.73,18.78 40.87,18.78 41.01,18.64 41.01,18.5 C10.2 41.08,18.43 41.36,18.16 41.36,17.7 C11.2 40.76,15.99 | 40.73,18.78 40.39,18.78 39.69,18.09 C12.2 39.69,18.02 39.69,17.88 38.93,17.12 38.72,17.12 38.38,16.77 38.38,15.18 39.21,14.35 X1.4 39.28,14.28 39.28,12.39 39.6,12.06 | 40.73,18.78 40.73,19.75 C13.2 40.66,19.82 40.66,23.63 41.01,23.97 41.01,25.22 39.97,26.26 38.79,26.26 37.96,27.09 37.62,27.09 J2.3 | C1.2 41.63,13.17 41.63,14.62 41.84,14.83 41.84,14.97 C2.2 41.84,15.04 41.84,15.18 41.03,15.99 40.76,15.99
  Top 0.15: 40.76,15.99 40.64,15.99 X1.2 | 35.75,4.58 35.75,7.28 C7.2 | 35.75,4.58 35.4,4.24 SW_DN.1 | 39,10.23 39,10.61 C8.2 39.07,10.61 39.28,10.61 39.5,10.83 39.5,11.86 39.7,12.06 | 39,10.23 C22.2 38.71,8.86 38.71,5.23 40.36,3.58 41.35,3.58 42.09,2.84 42.09,1.86 41.36,1.12 40.39,1.12 36.92,4.58 35.75,4.58 | 40,12.06 40.19,12.06 40.52,12.4 C3.2 | 40,12.06 39.7,12.06 | 39.7,12.06 39.6,12.06 | 39.6,12.06 39.1,12.06 C9.2 | C16.2 37.82,19.06 37.82,18.85 37.2,18.23 36.09,18.23 C15.2 36.09,18.29 36.09,19.61 34.71,20.99 30.28,20.99 C14.2 30.21,21.06 30.21,22.8 | J2.3 37.55,27.16 37.55,28.34 J2.5 | C42.2 29.93,29.72 29.93,26.6 28.2,24.87 27.92,24.87 D3.2 | R2_USB.2 25.22,26.6 25.36,26.6 27.09,24.87 27.85,24.87 D3.2 | 30.21,22.8 28.2,24.8 D3.2 | 30.21,22.8 30.55,22.8 31.25,23.49 31.25,24.13 33.4,26.28 33.75,26.28 | J2.3 37.48,27.16 37.2,27.16 36.51,26.47 35.19,26.47 34.85,26.12 33.91,26.12 33.75,26.28 | C43.1 29.38,32.35 28.68,32.35 27.37,33.67 J4.SH1 27.3,33.74 18.71,33.74 J4.SH2 18.64,33.67 18.64,30.21 18.36,29.93 J4.SH4 | v23.35,27.02 22.38,27.02 R1_USB.1 | J4.A1_B12 26.26,29.03 26.81,29.03 27.3,29.51 J4.SH3 27.37,29.58 29.41,31.63 C43.1 | IC9.C3 13.1,32.35 IC9.C2 13.17,32.35 13.52,32.35 IC9.C1 13.59,32.35 | EPD_C2.1 13.17,24.53 v13.79,25.15 14.07,25.43 14.07,26.12 EPD_C1.1 13.13,27.16 12.35,27.4 11.86,27.9 11.86,29.79 12.76,30.69 13.24,30.69 13.93,31.38 13.93,32.01 13.59,32.35 | 10.26,19.68 10.05,19.47 10.05,15.45 10.26,15.25 10.61,15.25 J1.17 | 10.26,19.68 10.61,19.68 J1.8 | C25.2 15.59,29.86 16.91,29.86 C33.2 16.98,29.86 18.36,29.86 18.64,29.58 J4.SH4 | v12.76,23.07 13.17,23.07 EPD_C5.1
  Top 0.15: J4.A12_B1 19.75,29.03 19.2,29.03 18.71,29.51 J4.SH4 | v9.92,20.09 10.26,19.75 10.26,19.68 | 33.75,26.28 32.01,28.02 32.01,31.59 30.76,32.84 29.93,32.84 29.44,32.35 C43.1 | v38.75,10.23 39,10.23 | 17.26,9.93 17.83,9.36 23,9.36 24.46,10.82 24.46,11.02 SJ1.1 24.53,11.09 24.53,12.82 25.67,13.97 26.09,13.97 | C34.1 7.33,27.26 U3.4 | IC9.B1 13.55,32.32 13.59,32.35 | 27.83,13.1 C20.2 | IC3.8 IC3.9 v27.28,7.85 | v12.3,5.93 12.83,5.93 13.03,5.73 | IC1.D2 10.48,6.67 10.12,6.31 | v10.58,6.13 10.4,6.31 10.12,6.31 | C4.2 40.6,11.29 40.6,11.46 40,12.06 | TP_BAT_GND.TP 6.83,32.37 C23.1 7.42,31.06 C27.1 8.27,30.87 8.51,30.62 8.81,30.62 | U3.6 8.67,27.77 8.4,28.04 | U3.4 6.97,27.27 6.52,27.71
  Bottom 0.15: v6.11,6.11 v7.22,5 | 29.4,7.46 27.67,7.46 v27.28,7.85 | 29.4,7.46 29.91,7.46 31.05,8.59 | U1.P$87 32.42,10.47 31.05,9.09 31.05,8.59 | v25.65,3.71 v25.65,3.72 27.38,3.72 v27.78,4.11 28.25,4.11 29.91,5.77 29.91,6.96 29.4,7.46 | v32.43,6.82 31.05,8.2 31.05,8.59 | v23.35,27.02 24.8,27.02 27.3,29.51 J4.SH3 | 14.28,25.15 18.64,29.51 J4.SH4 | 14.28,25.15 12.76,23.63 v12.76,23.07 12.76,23 12.62,22.86 v12.62,21.69 | v9.92,20.09 9.92,21.13 9.43,21.62 9.43,22.1 12.96,25.63 13.31,25.63 v13.79,25.15 14.28,25.15 | v38.75,10.23 38.51,10.47 36.09,10.47 U1.P$90 | v10.58,6.13 10.78,5.93 v12.3,5.93
  pour Top: -0.4,35.43 -0.4,-0.27 46.3,-0.27 46.3,35.43
  pour Bottom: -0.4,35.43 -0.4,-0.27 46.3,-0.27 46.3,35.43
IMU_INT1  (via drill 0.17)
  Top 0.15: v30.58,11.23 30.61,11.26 30.61,11.7 30.97,12.06 U1.P$N1 | IC3.5 28.27,7.29 v27.26,7.29
  Bottom 0.15: v30.58,11.23 30.58,10.99 28.72,9.14 28.01,9.14 26.7,7.83 26.7,7.63 27.05,7.29 v27.26,7.29
IMU_INT2  (via drill 0.17)
  Top 0.15: IC3.6 27.87,7.82 v27.81,7.88
  Bottom 0.15: v27.81,7.88 27.81,8.28 28.31,8.79 28.94,8.79 31,10.85 31,11.53 31.28,11.81 U1.P$P2
  other vias: 31.48,11.81
LX1  (via drill 0.3)
  Top 0.15: IC9.B2 13.1,31.94 12.76,31.94 IC9.B3 12.69,32.01 12.06,32.01 v11.99,32.08 | L7.1 16.88,32.74 v16.88,32.22
  Bottom 0.15: v11.99,32.08 12.19,31.88 16.53,31.88 v16.88,32.22
LX2  (via drill 0.17, 0.3)
  Top 0.15: IC9.D2 13.1,32.77 12.76,32.77 IC9.D3 12.69,32.7 12.34,32.7 v12.27,32.63 | L7.2 16.42,31.65 v15.78,32.3
  Bottom 0.15: v15.78,32.3 15.34,32.3 | 15.34,32.3 | 15.34,32.3 12.6,32.3 v12.27,32.63
N$1  (via drill 0.17)
  Top 0.15: U1.P$AC5 32.1,9.43 30.4,9.43 30.17,9.67 28.69,9.67 v28.64,9.61 | C20.1 28.86,11.89 28.6,11.63 v28.5,11.63 | v27.69,9.42 27.42,9.7 v26.43,9.7
  Bottom 0.15: v27.69,9.42 28.45,9.42 v28.64,9.61 | v28.5,11.63 28.36,11.63 v26.43,9.7
N$2
  Top 0.15: L2.2 32.91,18.09 32.91,19.89 33.39,20.37 L3.1
N$3  (via drill 0.17, 0.3)
  Top 0.15: v31.8,15.66 31.8,15.11 U1.P$B3 | v31.8,16.84 31.8,18.02 L2.1
  Bottom 0.15: v31.8,16.84 v31.8,15.66
N$4  (via drill 0.17, 0.3)
  Top 0.15: v39.83,13.45 39.83,13.65 40.46,14.28 X1.1 40.32,14.07 41.22,13.17 C1.1
  Bottom 0.15: v39.83,13.45 38.4,14.88 38,14.88 37.67,14.88 U1.P$B24
  other vias: 37.48,15.06
N$5  (via drill 0.3)
  Top 0.15: v12.69,11.99 13.1,12.41 13.31,12.41 EPD_C12.2 | v11.72,11.02 11.23,11.02 10.68,11.58 10.68,11.72 J1.24
  Bottom 0.15: v11.72,11.02 v12.69,11.99
N$6  (via drill 0.17, 0.3)
  Top 0.15: v37.48,15.59 36.99,15.59 U1.P$A23 | v38.86,16.63 38.86,16.15 39.21,15.8 X1.3 39.28,15.73 39.97,15.04 41.49,15.04 C2.1
  Bottom 0.15: v37.48,15.59 37.82,15.59 v38.86,16.63
N$7
  Top 0.15: R2.2 12.27,28.6 12.27,29.79 12.89,30.41 13.38,30.41 14.4,31.44 14.4,33.03 14.2,33.23 13.63,33.23 IC9.E1
N$8  (via drill 0.2)
  Top 0.15: v11.44,30.06 11.44,29.39 R4.2 | IC9.D1 13.95,32.75 v13.99,32.71
  Bottom 0.15: v13.99,32.71 13.63,33.07 11.54,33.07 11.44,32.96 v11.44,30.06
N$9  (via drill 0.3)
  Top 0.15: v8.05,6.59 9.71,6.59 9.85,6.73 10.05,6.73 IC1.D1 | v5.76,6.59 5.35,6.18 R9.2
  Bottom 0.15: v5.76,6.59 v8.05,6.59
N$10  (via drill 0.2)
  Top 0.15: C13.1 39.64,19.77 v39.6,19.73 | v38.7,18.83 36.95,17.08 34.93,17.08 34.76,16.9 v34.76,16.8
  Bottom 0.15: v39.6,19.73 v38.7,18.83 | v34.76,16.8 34.76,16.29 U1.P$A18
  other vias: 35.48,15.56
N$11  (via drill 0.17, 0.3)
  Top 0.15: v37.06,12.34 37.27,12.13 37.48,12.13 U1.P$N24 | v38.52,12.48 38.52,12.2 38.65,12.06 C9.1
  Bottom 0.15: v37.06,12.34 38.38,12.34 v38.52,12.48
N$12  (via drill 0.3)
  Top 0.15: v24.87,6.11 24.32,6.11 R3.2 | v26.26,6.66 26.67,6.66 26.74,6.73 IC3.1
  Bottom 0.15: v24.87,6.11 25.71,6.11 v26.26,6.66
N$13
  Top 0.15: C32.2 3.68,29.77 3.68,29.31 4.65,28.34 IC2.A2
N$14  (via drill 0.17, 0.3)
  Top 0.15: v37.48,13.52 37.34,13.38 36.99,13.38 U1.P$H23 | v39.83,12.82 40.04,12.82 40.32,13.1 40.46,13.1 C3.1 40.59,13.17 40.66,13.17 41.22,12.62 41.22,11.66 L1.1
  Bottom 0.15: v37.48,13.52 39.14,13.52 v39.83,12.82
N$15  (via drill 0.3)
  Top 0.15: v22.59,7.56 22.59,6.8 R_TYPE_SEL.2 | v22.59,9.85 22.59,10.68 22.94,11.02 SJ1.2 23,11.09 23.35,11.44 23.35,14.35 23,14.69 R1_EP_DR.1
  Bottom 0.15: v22.59,9.85 v22.59,7.56
N$16  (via drill 0.3)
  Top 0.15: v13.66,16.29 13.66,16.22 14.28,15.59 EPD_C10.2 | v9.92,13.1 9.92,12.89 10.05,12.75 10.61,12.75 J1.22
  Bottom 0.15: v13.66,16.29 13.1,16.29 v9.92,13.1
N$17  (via drill 0.3)
  Top 0.15: v13.79,17.6 14.14,17.95 14.14,18.43 EPD_C8.2 | v9.92,13.72 10.61,13.72 J1.20
  Bottom 0.15: v9.92,13.72 v13.79,17.6
N$18  (via drill 0.3)
  Top 0.15: v14.14,19.19 14.14,19.82 EPD_C7.2 | v9.92,14.35 10.54,14.35 10.61,14.28 J1.19
  Bottom 0.15: v14.14,19.19 14.14,18.57 v9.92,14.35
N$19  (via drill 0.3)
  Top 0.15: v14.21,20.58 14.21,21.55 EPD_C6.2 | v9.92,14.97 9.92,14.95 10.11,14.76 10.61,14.76 J1.18
  Bottom 0.15: v14.21,20.58 14.21,19.89 9.92,15.6 v9.92,14.97
N$20  (via drill 0.3)
  Top 0.15: v18.57,7.56 v18.57,7.55 19.05,7.08 C2-EP-DR.1 | v19.68,19.13 20.58,19.13 20.65,19.19 D5.2 20.72,19.26 20.79,19.33 | Q3.3 24.94,19.19 24.6,19.19 23.49,20.3 21.76,20.3 20.79,19.33 | 20.79,19.33 20.79,24.46 L5.1
  Bottom 0.15: v18.57,7.56 18.57,18.02 v19.68,19.13
N$21  (via drill 0.3)
  Top 0.15: v20.79,7.56 20.79,7.54 20.33,7.08 C2-EP-DR.2 | v20.79,10.47 20.79,11.23 D4.2 20.79,11.3 20.79,15.18 D2.1
  Bottom 0.15: v20.79,10.47 v20.79,7.56
N$22  (via drill 0.3)
  Top 0.15: v24.67,27.71 R2_USB.1 | v21.62,28.06 21.27,28.4 21.27,28.96 J4.B5
  Bottom 0.15: v24.67,27.71 24.18,27.71 23.42,28.47 22.03,28.47 v21.62,28.06
N$23  (via drill 0.17)
  other vias: 40.8,33.6 39,33.6 37.2,33.6 35.4,33.6 33.6,33.6 31.8,33.6 30,33.6 12,33.6 8.4,33.6 6.6,33.6 4.8,33.6 42.6,31.8 40.8,31.8 39,31.8 37.2,31.8 35.4,31.8 33.6,31.8 28.2,31.8 26.4,31.8 24.6,31.8 22.8,31.8 21,31.8 19.2,31.8 4.8,31.8 42.6,30 40.8,30 33.6,30 42.6,28.2 19.2,28.2 15.6,28.2 13.8,28.2 3,28.2 28.2,26.4 26.4,26.4 24.6,26.4 12,26.4 3,26.4 42.6,24.6 26.4,24.6 19.2,24.6 17.4,24.6 10.2,24.6 35.4,22.8 33.6,22.8 31.8,22.8 28.2,22.8 26.4,22.8 22.8,22.8 37.2,21 35.4,21 24.6,21 22.8,21 19.2,21 35.4,19.2 33.6,19.2 31.8,19.2 30,19.2 15.6,19.2 28.2,17.4 26.4,17.4 24.6,17.4 21,17.4 19.2,17.4 17.4,17.4 24.6,15.6 19.2,15.6 15.6,15.6 19.2,13.8 17.4,13.8 44.4,12 42.6,12 19.2,12 17.4,12 42.6,10.2 19.2,10.2 10.2,10.2 8.4,10.2 40.8,8.4 33.6,8.4 30,8.4 24.6,8.4 8.4,8.4 4.8,8.4 3,8.4 1.2,8.4 40.8,6.6 33.6,6.6 21,6.6 17.4,6.6 28.2,1.2 26.4,1.2 19.2,1.2 17.4,1.2 15.6,1.2 8.4,1.2 4.8,1.2 30,1.2 37.2,1.2 39,1.2 4.8,3 6.6,3 8.4,3 12,3 17.4,3 22.8,3 28.2,3 30,3 33.6,3 37.2,3 42.6,3 1.2,4.8 3,4.8 8.4,4.8 15.6,4.8 31.8,4.8 40.8,4.8 42.6,4.8 44.4,4.8 1.2,6.6 3,6.6 4.8,6.6
N$26
  Top 0.15: EPD_C2.2 14.07,24.46 13.17,23.56 12.61,23.56 11.65,22.59 11.65,22.38 11.02,21.76 10.68,21.76 J1.4
N$27  (via drill 0.3)
  Top 0.15: v13.1,25.15 13.1,26.12 EPD_C1.2 | v11.44,21.27 10.68,21.27 J1.5
  Bottom 0.15: v13.1,25.15 13.1,24.39 11.86,23.14 11.86,21.69 v11.44,21.27
N$29
  Top 0.15: R1_USB.2 22.38,26.47 23.42,26.47 24.18,27.23 24.18,28.89 24.25,28.96 J4.A5
OUT+  (via drill 0.3)
  Top 0.15: v4.86,28.75 5.14,28.47 5.14,28.34 IC2.A3 | v2.85,28.75 1.62,28.75 TP_OP.TP
  Bottom 0.15: v2.85,28.75 v4.86,28.75
OUT-  (via drill 0.3)
  Top 0.15: v5.55,26.95 5.48,26.95 5.21,27.23 IC2.C3 | v2.75,26.92 1.74,25.92 TP_ON.TP
  Bottom 0.15: v5.55,26.95 5.53,26.92 v2.75,26.92
P0.00/XL1  (via drill 0.17)
  Top 0.15: v30.97,14.07 31.06,14.07 31.27,14.28 31.45,14.28 U1.P$D2 | v29.77,14.71 29.01,15.46 X2.1 28.68,15.66 28.68,18.78 C17.2
  Bottom 0.15: v30.97,14.07 30.92,14.12 30.35,14.12 v29.77,14.71
P0.01/XL2  (via drill 0.17)
  Top 0.15: C18.2 27.16,18.63 27.16,16.77 26.12,15.73 X2.2 27.43,14.34 29.36,14.34 v29.42,14.27
  Bottom 0.15: v29.42,14.27 29.49,14.27 30.08,13.69 31.36,13.69 U1.P$F2
  other vias: 31.48,13.81
P0.13/1.5D  (via drill 0.3)
  Top 0.15: C30.2 15.73,3.34 15.73,3.06 15.25,2.57 R5.1 14.9,2.87 v14.9,3.27 | v11.3,3.47 10.61,4.17 SW_UP.2
  Bottom 0.15: v14.9,3.27 14.52,3.65 11.78,3.65 11.6,3.47 v11.3,3.47
P0.14/1.5D  (via drill 0.3)
  Top 0.15: C31.2 19.94,4.66 19.94,4.36 v19.75,4.17 19.54,3.96 19.54,2.78 R8.1 | v20.86,4.17 21.55,4.17 SW_ENT.2
  Bottom 0.15: v20.86,4.17 v19.75,4.17
P1.01/1.6C  (via drill 0.3)
  Top 0.15: v13.52,5.28 16.77,5.28 R_PWR_EPD.1 | v10.75,8.88 12.89,8.88 Q1.1
  Bottom 0.15: v13.52,5.28 10.75,5.28 9.09,6.94 9.09,7.21 v10.75,8.88
P1.02/1.6C
  Top 0.15: C29.2 31.18,3.61 32.01,3.61 32.56,4.17 SW_DN.2 32.63,4.24 32.98,4.58 32.98,7.91 32.84,8.05 32.15,8.05 32.01,7.91 32.01,7.21 31.87,7.08 31.87,6.59 30.55,5.28 30.55,3.27 31.11,2.71 31.11,2.51 R7.1
PMIC_INT  (via drill 0.17, 0.2)
  Top 0.15: IC1.A1 10.08,9.31 10.9,10.13 v11.9,10.13 | v20.2,12.63 v20.2,12.62 v16.07,12.62 | v23.73,13.31 24.28,13.31 24.94,13.96 v25.11,13.96 | v29.45,13.75 27.93,13.75 v27.77,13.91 | v29.57,12.84 29.48,12.75 v29.48,11.55 | v28.9,10.08 29.03,9.95 30.79,9.95 30.79,9.94 v30.89,9.94
  Bottom 0.15: v11.9,10.13 13.6,10.13 16.07,12.6 v16.07,12.62 | v20.2,12.63 23.05,12.63 v23.73,13.31 | v27.77,13.91 27.68,14 25.15,14 v25.11,13.96 | v29.57,12.84 v29.56,12.85 29.56,13.63 v29.45,13.75 | v29.48,11.55 28.9,10.98 v28.9,10.09 v28.9,10.08 | v30.89,9.94 31.07,9.94 31.48,10.36 U1.P$T2
  other vias: 31.48,11.31
PREVGH  (via drill 0.3)
  Top 0.15: D5.1 17.12,19.19 14.97,17.05 14.35,17.05 EPD_C9.2 14.28,16.98 v14.28,16.29 | v11.37,11.51 11.23,11.65 11.23,12.96 11.02,13.17 10.68,13.17 J1.21
  Bottom 0.15: v11.37,11.51 11.37,13.38 v14.28,16.29
PREVGL  (via drill 0.3)
  Top 0.15: D2.2 17.26,15.18 16.22,14.14 14.35,14.14 EPD_C11.2 14.31,13.97 14.63,13.65 v14.63,13.31 | v9.92,12.2 10.61,12.2 J1.23
  Bottom 0.15: v9.92,12.2 11.58,10.54 11.86,10.54 v14.63,13.31
RESE  (via drill 0.3)
  Top 0.15: 22.52,18.09 22.52,14.55 22.73,14.35 22.8,14.35 22.94,14.21 R1_EP_DR.2 | 22.52,18.09 22.87,18.43 Q3.2 | v11.37,22.93 11.37,22.65 10.96,22.24 10.68,22.24 J1.3 | v15.18,21.76 17.05,19.89 17.88,19.89 19.68,18.09 22.52,18.09
  Bottom 0.15: v11.37,22.93 11.37,21.83 10.95,21.41 10.95,21.13 11.3,20.79 13.38,20.79 14.35,21.76 v15.18,21.76
RESET  (via drill 0.2, 0.3)
  Top 0.15: v36.85,28.96 J2.6 | v43.64,18.64 44.61,17.67 TP_RESET.TP 45.5,16.72 v45.5,16.03
  Bottom 0.15: v36.85,28.96 36.85,28.13 36.09,27.37 36.09,24.25 39.42,20.93 41.36,20.93 v43.64,18.64 | v45.5,16.03 45.5,15.66 38.84,8.99 35.35,8.99 34.77,9.56 U1.P$AC13
  other vias: 34.23,9.56
RF
  Top 0.15: C22.1 39.42,9.22 39.42,10.24 39.81,10.63 | ANT1.1 44.26,9.98 43.85,9.57 41.01,9.57 L1.2 40.07,9.08 39.81,9.35 39.81,10.63 | C4.1 39.81,10.84 39.81,10.63
SCL/1.4C  (via drill 0.3)
  Top 0.15: v7.1,25.75 6.94,25.91 5.28,25.91 4.24,26.95 4.24,27.23 IC2.C1 | v8.32,26.6 9.42,26.6 10.26,27.44 10.26,27.93 9.93,28.27 U3.7
  Bottom 0.15: v8.32,26.6 8.32,26.58 7.49,25.75 v7.1,25.75
SCL/2.4C  (via drill 0.17, 0.2, 0.3)
  Top 0.15: v8.81,8.74 9.99,7.56 10.05,7.56 IC1.B1 | R4.1 v11.42,28.14 | v24.11,9.85 25.12,8.84 | 25.12,8.84 26.61,7.35 26.74,7.35 IC3.12 | v14.18,30.53 13.98,30.53 12.9,29.45 12.9,28.93 R17.2 | v41.33,19.23 41.55,19.44 41.55,22.09 44.61,25.15 44.61,25.74 TP_SCL.TP | 25.12,8.84 25.12,9.24 26.34,10.47 v26.34,11.11 | v29.49,11.02 29.31,11.2 27.77,11.2 v27.54,11.43
  Bottom 0.15: v8.81,8.74 8.81,11.85 7.77,12.89 7.77,24.49 v11.42,28.14 11.53,28.14 13.92,30.53 | 24.11,20.93 24.11,24.8 19.47,29.44 19.47,30.41 18.99,30.9 13.86,30.9 13.49,30.53 13.92,30.53 | 24.11,20.93 v24.11,9.85 | 13.92,30.53 v14.18,30.53 | v41.33,19.23 40.18,20.38 24.67,20.38 24.11,20.93 | v27.54,11.43 26.66,11.43 v26.34,11.11 | v29.49,11.02 29.79,11.02 31.1,12.33 31.46,12.33 U1.P$M2
  other vias: 31.48,12.31
SDA/1.4C  (via drill 0.2)
  Top 0.15: v9.2,30.33 9.29,30.25 U3.8
  Bottom 0.15: IC2.B2 7.24,30.33 v9.2,30.33
  other vias: 4.68,27.77
SDA/2.4C  (via drill 0.17, 0.3)
  Top 0.15: R2.1 12.72,27.63 R18.2 14.76,27.24 v14.76,24.04 | v9.57,7.08 10.05,7.08 IC1.C1 | v27.23,5.97 27.23,6.73 IC3.2 | v30.55,12.34 30.76,12.55 30.97,12.55 U1.P$L1 | v44.47,18.99 44.47,20.44 TP_SDA.TP
  Bottom 0.15: v9.57,7.08 14.14,7.08 15.14,6.07 | 15.14,6.07 16.56,4.65 23.7,4.65 | 23.7,4.65 24.39,4.65 25.01,4.03 25.29,4.03 v27.23,5.97 | v14.76,24.04 14.76,23.42 16.63,21.55 16.63,6.86 15.84,6.07 15.14,6.07 | v44.47,18.99 44.47,18.85 43.78,18.16 40.59,18.16 40.32,18.43 32.77,18.43 29.03,14.69 29.03,12.53 | 23.7,4.65 24.39,5.34 24.39,6.94 29.03,11.58 29.03,12.53 | 29.03,12.53 29.22,12.34 v30.55,12.34
SWDCLK  (via drill 0.17, 0.3)
  Top 0.15: v37.96,11.23 37.89,11.16 37.89,10.47 37.55,10.12 U1.P$AA24 | v44.96,27.78 43.85,28.89 TP_SWDCLK.TP | v36.92,27.57 36.51,27.16 36.3,27.16 J2.4
  Bottom 0.15: v37.96,11.23 38.86,11.23 44.96,17.32 44.96,25.53 | v44.96,27.78 44.96,26.26 44.96,25.53 | v36.92,27.57 37.48,27.57 38.79,26.26 44,26.26 44.23,26.26 44.96,25.53
SWDIO  (via drill 0.17, 0.3)
  Top 0.15: v37.85,9.39 37.65,9.39 U1.P$AC24 | v42.58,13.48 42.88,13.78 42.88,21.69 43.26,22.07 | 43.26,22.07 43.56,22.37 TP_SWDIO.TP | v38.24,26.19 37.96,26.47 37.27,26.47 36.72,25.91 36.3,25.91 J2.2 | v42.46,22.07 43.26,22.07
  Bottom 0.15: v42.58,13.48 42.43,13.48 40.85,11.9 40.57,11.9 39.8,11.13 39.81,11.13 39.81,10.37 39,9.57 | v38.24,26.19 38.24,25.5 37.96,25.22 37.96,23.97 39.87,22.07 v42.46,22.07
  Bottom 0.17: 39,9.57 38.02,9.57 v37.85,9.39
SWO  (via drill 0.17, 0.3)
  Top 0.15: v36.99,9.64 36.51,9.15 36.51,9.08 U1.P$AD22 | TP_SWO.TP 43.87,14.75 v43.37,14.26
  Bottom 0.15: v36.99,9.64 v36.99,9.65 37.2,9.86 38.9,9.86 39.39,10.35 39.39,11.21 40.4,12.23 40.7,12.23 42.73,14.26 v43.37,14.26
VBAT/1.2A
  Top 0.3: TP_VBAT.TP 3.69,31.22 3.84,31.22 5.42,29.65 6.62,29.65 | U3.3 U3.2 | U3.2 6.81,28.27 | U3.2 6.79,28.27 6.35,28.71 6.35,29.38 6.62,29.65 | C27.2 7.23,30.26 6.75,29.78 6.62,29.65
VBAT/2.5C
  Top 0.3: IC1.C2 10.9,7.13 11.2,6.83 11.2,6.13 10.65,5.58 8.55,5.58 7.48,4.51 C37.2
VBUS/1.5D
  Top 0.3: J4.A9_B4 20.6,29.5 21.03,29.93 25,29.93 25.3,29.63 25.3,29.09 J4.A4_B9 25.4,27.66 25.61,27.46 25.61,27.33 25.7,27.23 26.88,27.23 29.1,29.46 29.1,29.83 29.39,30.12 C42.1 30.01,30.12 30.41,30.53 30.41,31.03 | 30.41,31.03 C43.2 | D3.5 31.2,24.83 31.6,25.23 31.6,29.84 30.41,31.03
VBUS/2.6D
  Top 0.3: IC1.A2 10.98,7.93 11.08,8.03 11.8,8.03 12.27,7.57 13,7.57 | 13,7.57 14.96,7.57 15.48,8.09 24.06,8.09 27.21,4.93 29.7,4.93 31.46,6.69 C21.1 31.47,9.04 U1.P$AD2 | C38.2 12.5,6.58 12.5,7.07 13,7.57
VREG
  Top 0.15: IC1.B2 11.41,7.53 11.7,7.23
  Top 0.3: C23.2 8,31.58 9.04,31.58 9.77,30.84 C24.2 10.94,31.56 11.46,31.56 11.46,31.55 11.9,31.55 | 11.7,7.23 11.7,5.93 10.88,5.11 9.67,5.11 6.22,1.66 TP_VREG.TP 6,1.68 6,4.63 7.5,6.13 7.5,7.86 C39.1 7.39,8.07 9.4,10.08 9.4,25.86 10.91,27.36 10.91,30.56 11.9,31.55 | IC9.A1 IC9.A2 IC9.A3 11.9,31.55
(copper drawn outside any net)
  shapes: Bottom area x1, Top area x1

## Text on the board
SilkscreenTop: BGND | 3V3 | SWDC | OP | VBAT | ON | SCL | L5 | SWDIO | SDA | RES | SWO | GND | VREG | 3.3V